# Allegro board NightIoT_uBus_Sensor_AMG_PIR_V100_PCB.brd
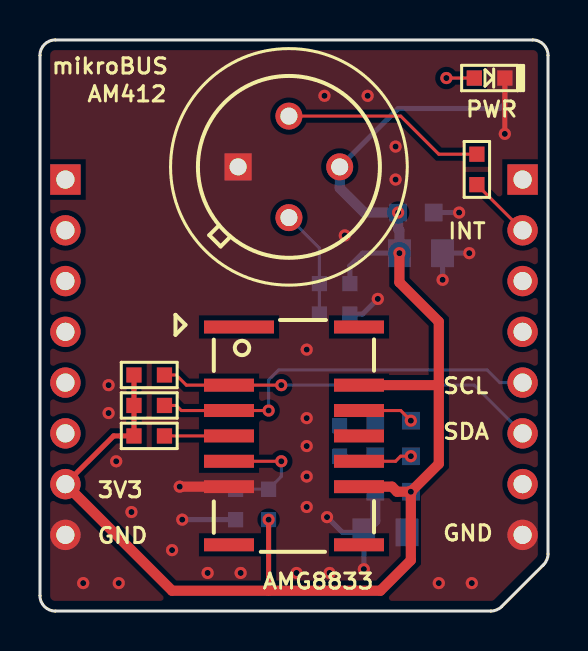
[diagram p0: board, top side]
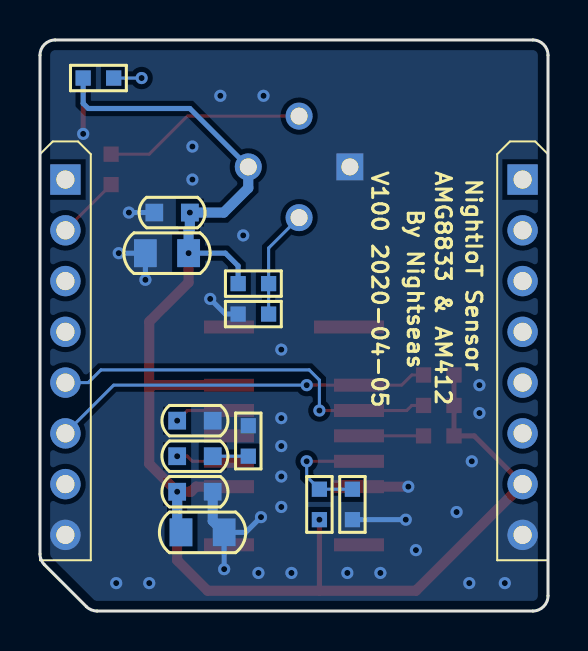
[diagram p1: board, bottom side, seen from below]

Outline 25.4 x 28.57 mm; copper layers: TOP, BOTTOM. Coordinates in mm from the lower left corner of the outline.
Outline path: 0,27.81 0,0.76 arc(0.22,0.22) 0.76,0 22.54,0 arc(22.84,0.06) 23.08,0.22 25.18,2.32 arc(25.34,2.56) 25.4,2.86 25.4,27.81 arc(25.18,28.35) 24.64,28.57 0.76,28.57 arc(0.22,28.35) 0,27.81

## Placement (name value [footprint] x y rotation side)
C1  0.1uF  [C0603]  18.8 19.94 270 bottom
C2  10uF  [C0805]  19.05 17.91 270 bottom
C3  2.2uF  [C0603]  17.65 9.53 90 bottom
C4  1uF  [C0603]  17.65 7.75 90 bottom
C5  0.1uF  [C0603]  17.65 5.97 90 bottom
C6  10uF  [C0805]  17.27 3.94 90 bottom
J1  uBUS_CON_A  [SIP8]  1.27 21.59 180 bottom
J2  uBUS_CON_B  [SIP8]  24.13 21.59 180 bottom
LD1  GRN  [LED0603]  21.72 26.67 0 top
R1  NC  [R0603]  15.49 16.38 180 bottom
R2  0R  [R0603]  15.49 14.86 180 bottom
R3  4.7K  [R0603]  4.7 10.29 0 top
R4  4.7K NC  [R0603]  6.22 8.76 180 top
R5  4.7K  [R0603]  4.7 11.81 0 top
R6  4.7K NC  [R0603]  11.43 6.1 270 bottom
R7  4.7K  [R0603]  9.78 6.1 270 bottom
R8  560R  [R0603]  23.24 26.67 180 bottom
R9  22R  [R0603]  14.99 7.75 90 bottom
R10  0R  [R0603]  21.84 21.34 90 top
U1  AM412  [AM412_4P]  12.45 22.23 0 top
U2  AMG8833  [AMG8833_SMD_14P]  12.7 8.76 0 top

## Library data of the parts
C1-C6 = CAP_CE_0603
J1 J2 = HEADER 8: User Part Number: ***
LD1 = LED_0805
R1-R8 R10 = R
R9 = R: signal model: DEFAULT_RESISTOR_4700OHM_2_1
U1 = AM412
U2 = AMG8833

## Footprints (pads in the part's own frame, mm; a bottom-side part is the same pattern mirrored in y, then rotated)
AM412_4P
  rect 1.35x1.35 hole 0.85: 1(-2.54,0)
  round 1.35 hole 0.85: 2(0,-2.54) 3(2.54,0) 4(0,2.54)
AMG8833_SMD_14P
  rect 3.5x0.65 smd: 1(-2.75,5.45)
  rect 2.5x0.65 smd: 2(-3.25,2.54) 3(-3.25,1.27) 4(-3.25,0) 5(-3.25,-1.27) 6(-3.25,-2.54) 7(-3.25,-5.45) 8(3.25,-5.45) 9(3.25,-2.54) 10(3.25,-1.27) 11(3.25,0) 12(3.25,1.27) 13(3.25,2.54) 14(3.25,5.45)
C0603
  rect 0.889x0.889 smd: 1(0,0.889) 2(0,-0.889)
C0805
  rect 1.397x1.143 smd: 1(0,1.079) 2(0,-1.079)
LED0603
  rect 0.762x0.762 smd: 1(0,0) 2(1.524,0)
R0603
  rect 0.762x0.762 smd: 1(0,0) 2(1.524,0)
SIP8
  rect 1.52x1.52 hole 0.91: 1(0,0)
  round 1.52 hole 0.91: 2(0,-2.54) 3(0,-5.08) 4(0,-7.62) 5(0,-10.16) 6(0,-12.7) 7(0,-15.24) 8(0,-17.78)

## Nets
GND: C1.2 C2.2 C3.2 C5.2 C6.2 J1.8 J2.8 LD1.2(CATHODE) R2.1 R7.2 R9.2 U1.1(VSS) U2.6(GND)
VDD3V3: C1.1 C2.1 C5.1 C6.1 J1.7 R1.1 R3.1 R4.2 R5.1 R6.2 R8.1 U1.3(VDD) U2.9(VDD) U2.13(VPP)
AM_INT: J2.2 R10.1
AM_INT_R: R10.2 U1.4(REL)
AM_ONTIME: R1.2 R2.2 U1.2(ONTIME)
AMG_ADDR: R6.1 R7.1 U2.5(ADSEL)
AMG_INT: R4.1 U2.4(INT)
I2C_SCL: J2.5 R3.2 U2.3(SCL)
I2C_SDA: J2.6 R5.2 U2.2(SDA)
N1536681: LD1.1(ANODE) R8.2
N1601715: C3.1 U2.12(DVDD-PC)
N1601720: C4.1 U2.10(AVDD-PC)
N1603879: C4.2 R9.1

Pads without a net: J1 1 2 3 4 5 6; J2 1 3 4 7; U2 1 7 8 11 14

## Via types
v1: diameter 0.61, hole 0.305, TOP to BOTTOM, 42 vias

## Routing (per net, layer and track width the routed paths; a pad name or vN(x,y) marks a point on that pad's centre or on a via; arc(x,y) is an arc through that point)
GND: length 19.8
  TOP w0.254: LD1.2 v1(23.24,23.88)
  TOP w0.508: U2.6 v1(6.99,6.22)
  BOTTOM w0.254: v1(20.13,16.57) C2.2 v1(21.46,17.91) ; v1(16.19,2.1) C6.2 15.11,3.94 v1(14.35,4.7) ; C1.2 v1(20.95,19.94) ; v1(16.89,15.62) 16.13,14.86 R2.1 ; R7.2 v1(7.11,4.57)
  BOTTOM w0.508: C6.2 16.76,4.51 C5.2
  vias: v1(2.16,1.4) v1(3.43,11.3) v1(3.43,9.91) v1(3.81,7.49) v1(3.94,1.4) v1(4.57,4.95) v1(6.6,3.05) v1(8.38,1.91) v1(10.03,1.91) v1(12.83,1.91) v1(13.34,13.08) v1(13.34,9.65) v1(13.34,8.26) v1(13.34,6.73) v1(13.34,5.21) v1(14.22,25.78) v1(14.48,1.91) v1(15.24,18.8) v1(16.38,25.78) v1(17.78,23.24) v1(17.78,21.59) v1(19.94,1.4) v1(21.59,1.4)
VDD3V3: length 77.7
  TOP w0.254: J1.7 3.68,8.76 R4.2 R3.1 R5.1 ; v1(11.43,4.57) 11.43,1.02
  TOP w0.508: 19.94,11.3 19.94,14.48 17.97,16.45 v1(17.97,17.91) ; 19.94,11.3 U2.13 ; 19.94,11.3 19.94,7.37 v1(18.54,5.97) ; v1(18.54,5.97) 17.85,5.97 17.6,6.22 U2.9 ; v1(18.54,5.97) 18.54,2.54 17.02,1.02 6.6,1.02 J1.7
  BOTTOM w0.254: R1.1 15.49,17.27 16.13,17.91 v1(17.97,17.91) ; R8.1 23.24,25.4 22.99,25.15 17.91,25.15 U1.3
  BOTTOM w0.508: U1.3 14.99,21.17 16.21,19.94 v1(17.91,19.94) 17.91,19.11 17.97,19.05 v1(17.97,17.91) ; C6.1 18.54,4.13 v1(18.54,5.97)
AM_INT: length 3.2
  TOP w0.152: R10.1 J2.2
AM_INT_R: length 10.2
  TOP w0.152: U1.4 18.03,24.77 19.94,22.86 R10.2
AM_ONTIME: length 5.5
  BOTTOM w0.152: 12.45,19.68 13.97,18.16 R1.2 R2.2
AMG_ADDR: length 5.9
  TOP w0.152: U2.5 v1(12.06,7.49)
  BOTTOM w0.152: R7.1 R6.1 12.06,6.73 v1(12.06,7.49)
AMG_INT: length 3.2
  TOP w0.152: R4.1 U2.4
I2C_SCL: length 20
  TOP w0.152: R3.2 6.81,10.29 7.06,10.03 U2.3 v1(11.43,10.03)
  BOTTOM w0.152: J2.5 22.99,11.43 22.35,12.06 11.94,12.06 11.43,11.56 v1(11.43,10.03)
I2C_SDA: length 19.1
  TOP w0.152: R5.2 6.81,11.81 7.32,11.3 U2.2 v1(12.06,11.3)
  BOTTOM w0.152: J2.6 21.72,11.3 v1(12.06,11.3)
N1536681: length 2.8
  TOP w0.152: LD1.1 v1(20.32,26.67)
  BOTTOM w0.152: v1(20.32,26.67) LD1.1
N1601715: length 2.8
  TOP w0.152: v1(18.54,9.53) 18.03,10.03 U2.12
N1601720: length 2.7
  TOP w0.152: U2.10 17.78,7.49 18.03,7.75 v1(18.54,7.75)
N1603879: length 1.8
  BOTTOM w0.152: R9.1 C4.2

## Copper pours and planes (outline as drawn; the poured copper is in the pictures)
GND on TOP: 0.76,0.51 0.58,0.58 0.51,0.76 0.51,27.81 0.58,27.99 0.76,28.07 24.64,28.07 24.82,27.99 24.89,27.81 24.89,2.86 24.87,2.76 24.82,2.68 22.72,0.58 22.64,0.53 22.54,0.51 ; 2 cut-outs
GND on BOTTOM: 0.76,0.51 0.58,0.58 0.51,0.76 0.51,27.81 0.58,27.99 0.76,28.07 24.64,28.07 24.82,27.99 24.89,27.81 24.89,2.86 24.87,2.76 24.82,2.68 22.72,0.58 22.64,0.53 22.54,0.51 ; 1 cut-out

## Text on the board
Ref Des/Silkscreen Bottom: NightIoT Sensor | AMG8833 & AM412 | By Nightseas | V100 2020-04-05
Ref Des/Silkscreen Top: mikroBUS | AM412 | 3V3 | GND | AMG8833 | SCL | SDA | INT | PWR
